# Altium PCB Copy of ACDC.PcbDoc (part 2 of 2)
Units mil, origin at the board's own origin, x right, y up, seen from the top; angles counter-clockwise.
Board outline 4750 x 3250 mil, 4 copper layers (Top Layer, Layer 1, Layer 2, Bottom Layer), stack 23.756 mil thick; 131 components, 94 nets, 665 pads, 112 vias.
Unrouted connection lines stored in the file: 74.
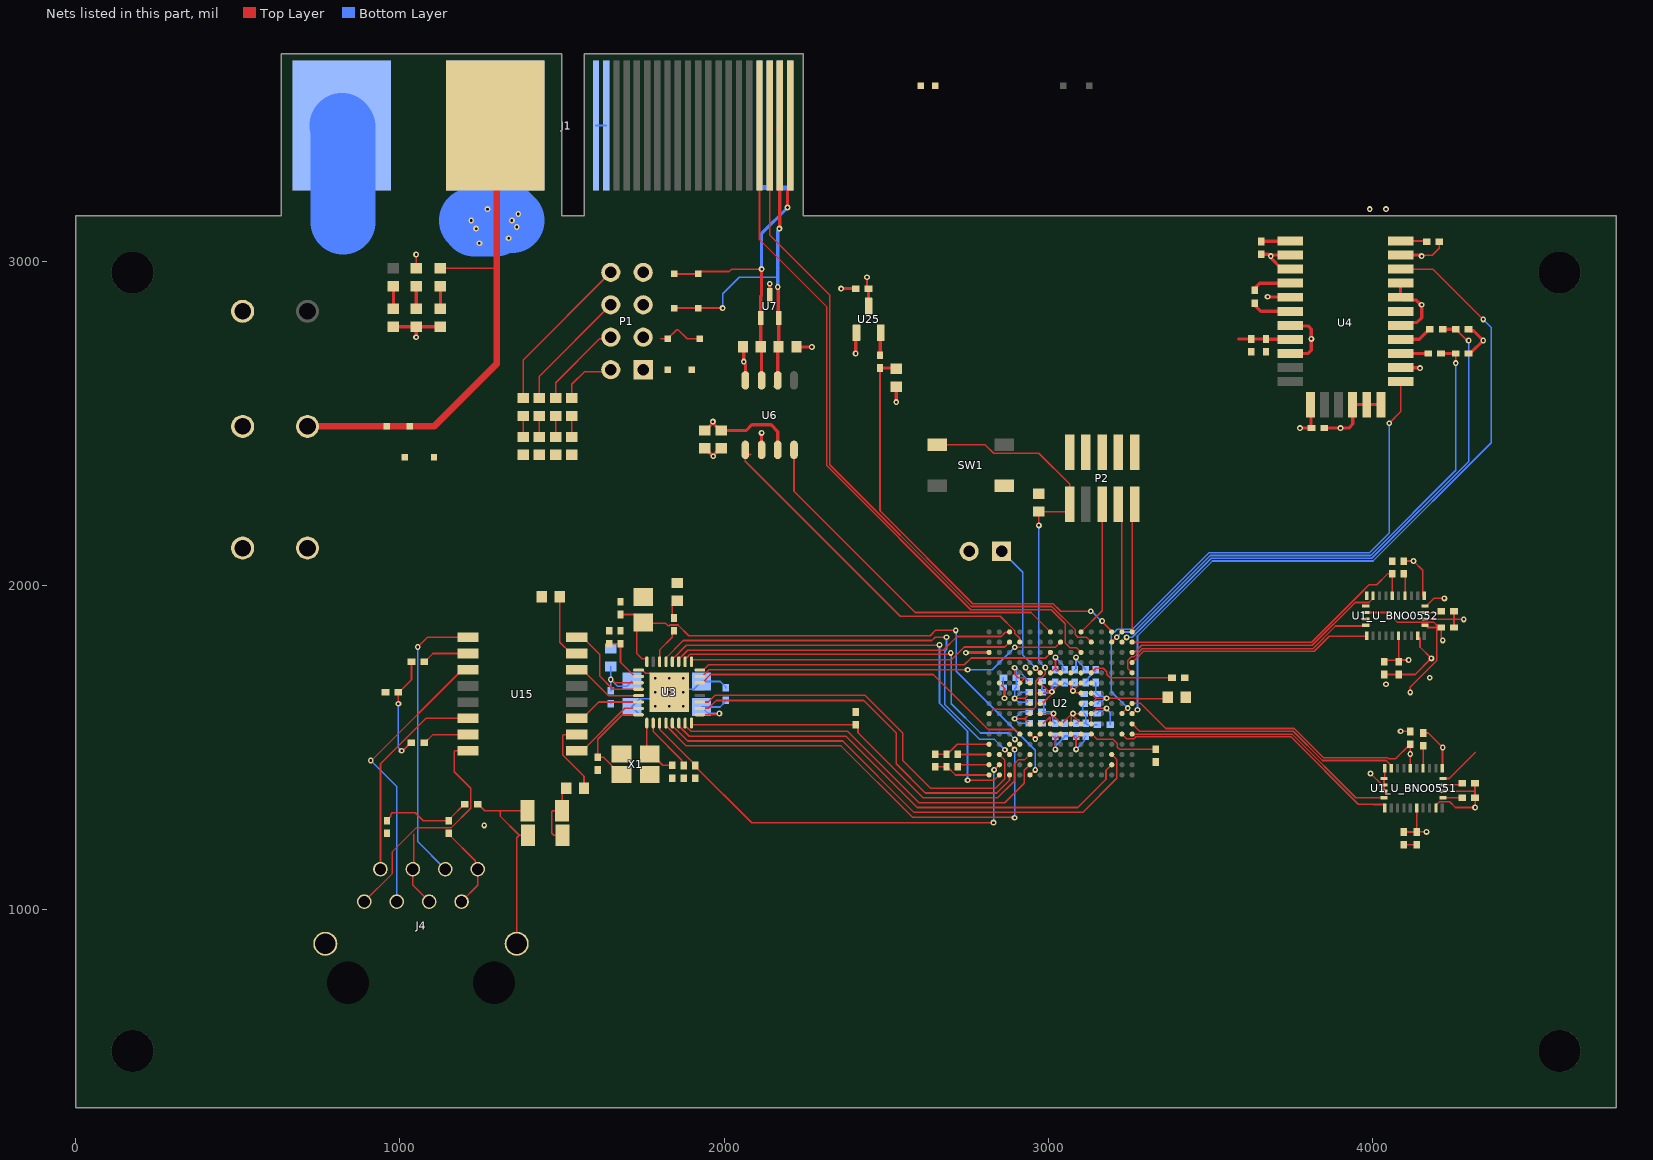
[diagram p4: the nets of this part, all layers, seen from the top]

## Via types
v1: diameter 18, hole 8, Top Layer to Bottom Layer, tented both sides, 102 vias
v2: diameter 19.68, hole 7.87, Top Layer to Bottom Layer, tented both sides, 9 vias
v3: diameter 18, hole 10, Top Layer to Bottom Layer, tented both sides, 1 vias

## Nets (pads, with @x,y where several pads share a name; then routed paths per layer and width w, separated by ;. In a path a pad name is that pad's centre, name@x,y a point inside that pad or via, vN(x,y) a via of type N, cw(c..) or ccw(c..) an arc to the next point about the centre after c; other vN are vias at no path point) (continued)
3V3: C1_U_BNO0551.2 C1_U_BNO0552.2 C3_U_BNO0551.2 C3_U_BNO0552.2 C4_U_BNO0551.2 C4_U_BNO0552.2 C6.2 C7.2 C8.2 C9.2 C10.2 C11.2 C12.2 C13.2 C14.2 C15.2 C16.2 C17.2 C18.2 C19.2 C20.2 C21.2 C22.2 C23.2 C24.2 C27.2 C28.2 C30.2 C33.1 C34.2 C35.2 C36.2 C37.2 C38.2 C42.2 C46.2 C47.2 C168.1 D8.1 FB1.1 J1.23 J12.1 J13.1 J15.1 P2.1 R2.2 R4_U_BNO0551.1 R4_U_BNO0552.1 R5_U_BNO0551.2 R5_U_BNO0552.2 R8.1 R11.2 U1_U_BNO0551.3 U1_U_BNO0551.5 U1_U_BNO0551.28 U1_U_BNO0552.3 U1_U_BNO0552.5 U1_U_BNO0552.28 U2.C1 U2.E7 U2.E8 U2.E9 U2.E10 U2.F4 U2.F5 U2.F11 U2.G5 U2.G11 U2.H5 U2.H11 U2.J5 U2.J11 U2.K5 U2.K11 U2.L7 U2.L8 U2.L9 U2.L10 U2.P1 U2.R1 U3.17 U4.8 U4.12 U6.3 U25.1 | length 4492.5
  Top Layer w5: R2.2@1050,2977.56 v1(1050,3020) ; U3.17@1924.49,1601.1 1977.58,1601.1 1981.48,1605 v1(1985,1605) ; C37.2@2650,1440.31 2687.74,1440.31 2712.54,1415.51 U2.R1@2816.54,1415.51 ; C38.2@2720,1440.31 2726.69,1447.01 U2.P1@2816.54,1447.01 ; v1(2895,1588.75) 2926.76,1588.75 U2.K5@2942.52,1572.99 ; v1(2895.25,1651.5) 2926.54,1651.5 ; v1(2895.28,1745.83) 2895.28,1726.36 2906.68,1714.95 2927,1714.95 ; U2.F4@2911.02,1698.98 2927,1714.95 ; 2926.78,1588.75 U2.J5@2942.52,1604.49 ; U2.H5@2942.52,1635.98 2927,1651.5 2926.54,1651.5 ; U2.G5@2942.52,1667.48 2926.54,1651.5 ; U2.F5@2942.52,1698.98 2927,1714.5 2927,1714.95 ; U2.L7@3005.51,1541.5 3020.87,1526.13 3020.87,1525.36 ; U2.E7@3005.51,1730.47 3021.01,1745.97 ; v1(3020.88,1494.25) 3020.87,1525.36 ; v1(3021.26,1778.1) 3021.26,1746.22 U2.E8@3037.01,1730.47 ; U2.L8@3037.01,1541.5 3020.87,1525.36 ; U2.L9@3068.5,1541.5 3084.64,1525.36 ; 3084,1743.99 3084,1744.51 ; v1(3084.64,1494.25) 3084.64,1525.36 ; U2.L10@3100,1541.5 3084.64,1526.13 3084.64,1525.36 ; U2.K11@3131.5,1572.99 U2.J11@3131.5,1604.49 3147.63,1620.62 v1(3178.74,1620.62) ; U2.H11@3131.5,1635.98 3147.51,1652 ; U2.G11@3131.5,1667.48 3146.98,1652 3147.51,1652 ; C35.2@3367.44,1655 3362.44,1650 3269.49,1650 3267.49,1652 v1(3178.75,1652) 3147.51,1652 ; C3_U_BNO0552.2@4035,1725.31 4130.31,1725.31 v1(4180,1775) 4145,1810 4145,1837.91 ; v1(4085,1550) 4114.69,1550 R5_U_BNO0551.2@4115,1549.69 ; C3_U_BNO0551.2@4095,1200.31 C4_U_BNO0551.2@4135,1200.31 ; U1_U_BNO0552.3@4156.04,1895.16 4156.2,1895 4249.69,1895 ; U1_U_BNO0552.5@4156.04,1934.53 4162.44,1934.53 4187.91,1960 v1(4220,1960) ; U1_U_BNO0551.28@4193.9,1313.48 4193.9,1321.85 4204.86,1332.82 4236.76,1332.82 4254.58,1315 v1(4315,1315) 4315,1344.69 C1_U_BNO0551.2@4314.69,1345 4314.69,1365 ; U1_U_BNO0551.3@4216.04,1365.16 4216.2,1365 4314.69,1365 ; U1_U_BNO0551.5@4216.04,1404.53 4234.86,1404.53 4315,1484.67 ; C1_U_BNO0552.2@4249.69,1870 4249.69,1895 ; R4_U_BNO0552.1@4249.69,1920 4249.69,1895 ; v1(4280,1895) 4249.69,1895 ; R4_U_BNO0551.1@4314.69,1390 4314.69,1365
  Top Layer w10: C33.1@1940,2477.56 1941.97,2477.56 1963.47,2499.06 1963.47,2503.47 v1(1965,2505) 1966.53,2503.47 1966.53,2499.06 1988.03,2477.56 C34.2@1990,2477.56 2067.64,2477.56 2085.08,2495 2144.14,2495 2165,2474.14 U6.3@2165,2417.72 ; v1(2360,2915) C168.1@2405.32,2915 ; v1(2405,2715) 2405,2776.06 U25.1@2407.6,2778.66 ; v1(2745,1792) 2745.73,1792.73 2815.8,1792.73 U2.C1@2816.54,1793.46 ; 3585.16,2759.84 3624.84,2759.84 C27.2@3625,2759.69 C28.2@3670,2759.69 3670.69,2759 3744.31,2759 U4.8@3745,2758.31 U4.8@3743.22,2756.53 ; v1(3775,2485) C30.2@3810.31,2485 3808.96,2486.36 3808.96,2556.16 U4.12@3807.6,2557.52 ; v1@4039.84,3159.84 v1(4040,3160)
  Bottom Layer w5: v1(1985,1605) 1950,1605 C46.2@1930,1625 1986.65,1625 C47.2@2000.98,1639.33 ; C47.2@2000,1640.32 C47.2@2005,1645.31 ; v1@2895.28,1740 v1(2895.28,1745.83) ; 2904.63,1740 2901.28,1743.35 2898.35,1743.35 2895,1740 2897.59,1740 2900,1737.59 2900,1685.63 C15.2@2899.37,1685 2895.25,1680.88 v1(2895.25,1651.5) ; 2919.31,1726.32 2919.31,1724.35 2938.66,1705 C23.2@2940.63,1705 ; C24.2@2936.06,1570.75 C24.2@2940.31,1575 2908.75,1575 v1(2895,1588.75) 2916.25,1610 C21.2@2940.31,1610 ; C22.2@2940.31,1640 2907.08,1640 2895.58,1651.5 v1(2895.25,1651.5) ; C16.2@2940.31,1670 2913.75,1670 v1(2895.25,1651.5) ; C19.2@3020,1535.31 3021,1534.31 3021,1494.38 v1(3020.88,1494.25) ; C18.2@3020,1739.69 3025,1734.69 3043.03,1734.69 C6.2@3050,1741.65 ; v1(3021.26,1778.1) 3043.71,1755.65 3043.71,1745.98 C6.2@3050,1739.69 ; 3023.36,1507.02 3050,1533.66 C17.2@3050,1535.63 C20.2@3085,1535.63 3085,1495 v1@3085.19,1494.81 ; C7.2@3080,1739.69 3084.25,1743.94 v1(3084.25,1778.1) 3086.74,1775.61 3086.74,1769.91 3115,1741.65 C11.2@3115,1739.69 ; v1(3084.64,1494.25) v1@3085.19,1494.81 ; C11.2@3110,1744.69 C11.2@3114.69,1740 ; C13.2@3115,1535.31 3109.32,1529.63 3109.32,1518.93 v1@3085.19,1494.81 ; C42.2@3145,1700.31 3145,1669.69 C10.2@3149.69,1665 3157.03,1657.66 3169.57,1657.66 v1@3175.23,1652 ; C8.2@3149.37,1605 3156.71,1612.34 3166.95,1612.34 3175.22,1620.62 v1(3178.74,1620.62) 3178.74,1618.41 3189.69,1607.46 C12.2@3189.69,1570 ; C9.2@3149.69,1635 3157.03,1642.34 3165.57,1642.34 v1@3175.23,1652 ; v1(3178.75,1652) v1@3175.23,1652
  Bottom Layer w200: v1(1220,3125) 1230.32,3114.68 1295,3114.68 ; J1.23@1294,3417.75 1295,3416.75 1295,3175 v1(1345,3125)
  other v1: 4175,1715 1245,3055 1335,3070 1235,3100 1360,3105 1365,3145 1270,3160
5V0: J1.1 J10.1 J11.1 J16.1 R1.2 | length 1576.8
  Top Layer w5: R1.2@1125,2977.56 1299,2977.56 1300.84,2979.39
  Top Layer w20: J16.1@715,2490 1105,2490 1299,2684 1299,2977.56 J1.1@1299,3412.75
  Top Layer w30: J1.1@1294,3417.75 J1.1@1299,3412.75
ANT_I: C25.2 U4.4 | length 115.9
  Top Layer w10: C25.2@3635,2917.56 3636.97,2917.56 3651.1,2931.69 U4.4@3745,2931.69
ANT_O: C25.1 U4.6 | length 117.2
  Top Layer w10: C25.1@3635,2862.44 3636.97,2862.44 3654.41,2845 U4.6@3745,2845
BNORX: U1_U_BNO0552.20 U2.D15 | length 752.7
  Top Layer w5: U2.D15@3257.48,1761.97 3266.39,1770.88 3266.84,1770.88 3292.41,1796.46 3818.55,1796.46 3865.57,1843.48 U1_U_BNO0552.20@3976.42,1843.48
BNORX1: U1_U_BNO0551.20 U2.L14 | length 914.3
  Top Layer w5: U2.L14@3225.98,1541.5 3240.03,1527.45 3263.3,1527.45 3268.8,1532.95 3747.05,1532.95 3955,1325 3999.58,1325 4000.31,1324.27 4034,1324.27 4036.42,1321.85 U1_U_BNO0551.20@4036.42,1313.48
BNOTX: U1_U_BNO0552.19 U2.E15 | length 818.3
  Top Layer w5: U2.E15@3257.48,1730.47 3243.44,1744.52 3243.44,1767.79 3255.07,1779.42 3263.3,1779.42 3288.88,1805 3815.01,1805 3884.57,1874.57 3973.05,1874.57 U1_U_BNO0552.19@3973.96,1875.47
BNOTX1: U1_U_BNO0551.19 U2.L15 | length 857.7
  Top Layer w5: U2.L15@3257.48,1541.5 3750.59,1541.5 3946.61,1345.47 U1_U_BNO0551.19@4033.96,1345.47
Boot0: P1.1@2855,2105 U2.E6 | length 423.8
  Top Layer w5: v1(2960,1745) 2960,1744.74 2974.02,1730.73 U2.E6@2974.02,1730.47
  Bottom Layer w5: P1.1@2855,2105 2920,2040 2920,1785 v1(2960,1745)
CANRX: U2.A7 U6.4 | length 1097.8
  Top Layer w5: U6.4@2215,2417.72 2215,2290 2588.54,1916.46 2945.51,1916.46 U2.A7@3005.51,1856.46
CANTX: U2.B4 U6.1 | length 1140.3
  Top Layer w5: U6.1@2065,2417.72 2065,2409.99 2065,2382.93 2067.93,2380 2542.93,1905 2850.84,1905 2895,1860.84 2895,1852.62 2910.88,1836.74 2910.88,1825.1 U2.B4@2911.02,1824.96 ; U6.1@2067.23,2409.99 2073.6,2403.62 2081.38,2403.62
CGND: C142.2 C145.2 C146.2 J4.9 J4.10 R51.1 | length 627.2
  Top Layer w5: C142.2@1239.69,1325 1241.65,1325 1261.65,1305 1308.7,1305 ; J4.10@1360,895 1360,1222.3 1367.7,1230 ; C146.2@1393.7,1305 1308.7,1305 ; R51.1@1395,1230 1367.7,1230 ; 1308.7,1305 1308.7,1289 1367.7,1230
  other v1: 1260,1260
COL: U2.R2 U3.28 | length 1409.5
  Top Layer w5: U3.28@1839.84,1764.49 1839.84,1774.99 1842.08,1777.23 1844.95,1777.23 1882.72,1815 2662,1815 v1(2663.5,1816.5) ; v1(2750,1399.01) 2831.53,1399.01 U2.R2@2848.03,1415.51
  Bottom Layer w5: v1(2663.5,1816.5) 2663.5,1636.5 2750,1550 v1(2750,1399.01)
CRS: U2.N3 U3.29 | length 1375.7
  Top Layer w5: U3.29@1820.16,1764.49 1820.16,1776.3 1873.86,1830 2640.17,1830 2650.17,1840 v1(2685,1840) ; v1(2865,1493) U2.N3@2879.53,1478.5
  Bottom Layer w5: v1(2685,1840) 2685,1801.67 2680,1796.67 2680,1632.92 2787.92,1525 2833,1525 v1(2865,1493)
FIX': U2.J14 U4.18 | length 1735.8
  Top Layer w5: U2.J14@3225.98,1604.49 3225.98,1605.98 v1@3240,1620 ; v1(4050,2500) 4085.16,2535.16 U4.18@4085.16,2628.39
  Bottom Layer w5: v1(3244,1621.75) 3193.46,1672.29 3193.46,1846.87 3211.34,1864.75 3258.51,1864.75 3494.38,2100.63 3989.38,2100.63 4050,2161.25 v1(4050,2500)
GND: C1_U_BNO0551.1 C1_U_BNO0552.1 C2_U_BNO0551.1 C2_U_BNO0552.1 C3_U_BNO0551.1 C3_U_BNO0552.1 C4_U_BNO0551.1 C4_U_BNO0552.1 C5.1 C6.1 C7.1 C8.1 C9.1 C10.1 C11.1 C12.1 C13.1 C14.1 C15.1 C16.1 C17.1 C18.1 C19.1 C20.1 C21.1 C22.1 C23.1 C24.1 C26.1 C27.1 C28.1 C29.1 C30.1 C31.1 C32.1 C33.2 C34.1 C35.1 C36.1 C37.1 C38.1 C39.2 C40.1 C41.1 C42.1 C43.2 C44.2 C45.2 C46.1 C47.1 C48.1 C49.2 C50.1 C51.2 C52.2 C146.1 C167.2 C168.2 D1.2 D2.2 D3.2 D4.2 D5.2 D6.2 D7.2 J1.22 J1.40 J1.41 J1.42 J1.43 J14.2 J15.2 J16.2 J17.1 J18.1 L1.2 P1.2@2755,2105 P2.3 P2.5 P2.7 P2.9 R10.1 R12.2 R18.1 R51.2 SW1.4 U1_U_BNO0551.2 U1_U_BNO0551.6 U1_U_BNO0551.15 U1_U_BNO0551.16 U1_U_BNO0551.17 U1_U_BNO0551.18 U1_U_BNO0551.25 U1_U_BNO0552.2 U1_U_BNO0552.6 U1_U_BNO0552.15 U1_U_BNO0552.16 U1_U_BNO0552.17 U1_U_BNO0552.18 U1_U_BNO0552.25 U2.E5 U2.F2 U2.F6 U2.F7 U2.F8 U2.F9 U2.F10 U2.G6 U2.G10 U2.H6 U2.H10 U2.J6 U2.J10 U2.K6 U2.K7 U2.K8 U2.K9 U2.K10 U2.L5 U2.L6 U2.M1 U2.N1 U3.1 U3.33 U4.2 U4.3 U4.5 U4.7 U4.9 U4.15 U4.16 U4.17 U4.19 U4.22 U4.23 U4.24 U4.25 U4.27 U6.2 U6.8 U7.3 U25.3 X1.2 X1.4 | length 6804.3
  Top Layer w5: R51.2@1501.3,1230 1474,1230 1467.92,1236.08 1467.92,1302.07 1470.85,1305 C146.1@1500,1305 1500,1362.56 C49.2@1512.44,1375 ; U3.1@1735.51,1738.9 1747.32,1738.9 1757.7,1728.52 1771.48,1728.52 v2(1786.69,1713.31) ; v1(2440,2950) 2440,2919.69 C168.2@2444.69,2915 ; C37.1@2650,1479.68 C36.1@2685,1479.68 2687.74,1479.68 2718.05,1510 U2.M1@2816.54,1510 ; C38.1@2720,1479.68 2721.18,1478.5 U2.N1@2816.54,1478.5 ; U2.F2@2846.02,1698.98 U2.F2@2848.03,1698.98 2864,1683.01 v1(2864,1651.75) ; v1@2930,1740 2930.13,1740 2939.65,1730.47 U2.E5@2942.52,1730.47 ; U2.L5@2942.52,1541.5 2942.76,1541.5 2958.26,1526 v1(2958.5,1526) U2.L6@2974.02,1541.5 ; U2.F6@2973.5,1697.01 U2.F6@2977.99,1697.01 ; U2.K6@2974.02,1572.99 2975.49,1574.46 2984.46,1574.46 3003.75,1593.75 ; U2.J6@2974.02,1604.49 2974.27,1604.74 3014.74,1604.74 v1(3015,1605) ; U2.H6@2974.02,1635.98 2976.12,1638.09 2983.22,1638.09 3010,1664.87 v1(3010,1672.2) ; U2.G6@2974.02,1667.48 3001.76,1667.48 v1@3006.48,1672.2 ; U2.F6@2974.02,1698.98 2998.31,1674.69 3007.51,1674.69 v1(3010,1672.2) ; v1@3004.64,1670.36 v1@3006.48,1672.2 ; U2.K7@3005.51,1572.99 3005.51,1591.99 3015,1601.48 v1(3015,1605) ; U2.F7@3005.51,1698.98 3007.62,1696.87 v1@3007.62,1674.58 ; U2.K8@3036.5,1571.26 3036.5,1575.63 3017.49,1594.64 3017.49,1601.48 3015,1603.97 v1(3015,1605) ; U2.K8@3036.5,1572.48 U2.K8@3037.01,1572.99 3039.98,1572.99 3071.99,1605 v1(3075,1605) ; U2.F8@3037.01,1698.98 3036.89,1698.98 3010.11,1672.2 v1(3010,1672.2) ; U2.K9@3068.5,1572.99 3070,1574.49 3070,1596.48 3075,1601.48 v1@3075,1604.74 ; U2.F9@3068.5,1698.98 3068.5,1680.01 3073.83,1674.69 v1(3075,1674.69) 3075.35,1674.69 3099.65,1698.98 U2.F10@3100,1698.98 ; v1@3078.52,1674.69 3084.5,1668.7 3098.78,1668.7 U2.G10@3100,1667.48 ; U2.K10@3100,1572.99 3077.49,1595.5 3077.49,1602.51 v1(3075,1605) ; U2.J10@3100,1604.49 3099.74,1604.74 v1@3075,1604.74 ; U1_U_BNO0552.16@3969.75,1938.46 3972.17,1936.04 U1_U_BNO0552.16@3978.17,1936.04 3975.51,1936.04 U1_U_BNO0552.16@3974,1934.53 ; U1_U_BNO0552.18@3975,1899.09 3977.42,1896.67 U1_U_BNO0552.18@3978.17,1896.67 ; U1_U_BNO0552.17@3975,1913.94 3977.42,1916.36 4044.9,1916.36 4075.55,1885.71 4187.86,1885.71 4196.5,1877.07 4196.5,1870 ; v1(3992.4,1420) 4027.56,1384.84 U1_U_BNO0551.17@4033.96,1384.84 ; U1_U_BNO0551.18@4033.96,1365.16 U1_U_BNO0551.17@4033.96,1384.84 ; U1_U_BNO0551.16@4033.96,1404.53 U1_U_BNO0551.17@4033.96,1384.84 ; U1_U_BNO0551.16@4033.96,1404.53 4036.42,1406.95 U1_U_BNO0551.15@4036.42,1436.52 ; C3_U_BNO0552.1@4035,1764.68 4040,1769.68 4079.68,1769.68 C4_U_BNO0552.1@4080,1770 ; U1_U_BNO0552.25@4080,1847.84 C4_U_BNO0552.1@4080,1770 ; C2_U_BNO0552.1@4095,2074.68 4095.32,2075 v1(4125,2075) 4153.58,2046.42 U1_U_BNO0552.6@4153.58,1966.52 ; 4105,1241.65 4106.97,1239.68 C4_U_BNO0551.1@4135,1239.68 ; v1(4110,1770) C4_U_BNO0552.1@4080,1770 ; v1(4115,1670) 4115,1686.67 4196.5,1768.17 4196.5,1870 ; U1_U_BNO0551.25@4134.84,1313.48 4134.84,1239.84 C4_U_BNO0551.1@4135,1239.68 ; v1(4150,3015) 4152.49,3017.49 4182.49,3017.49 4204.69,3039.69 L1.2@4204.69,3060 L1.2@4202.72,3060 ; C2_U_BNO0551.1@4155,1544.68 4170.31,1544.68 v1(4215,1500) 4214.29,1499.29 4214.29,1437.22 U1_U_BNO0551.6@4213.58,1436.52 ; U1_U_BNO0552.2@4160.26,1876.99 4161.77,1875.47 4162.44,1875.47 4167.91,1870 4196.5,1870 ; v1(4165,1240) 4135.32,1240 C4_U_BNO0551.1@4135,1239.68 ; v1(4215.2,1830.2) 4215,1830.41 4215,1833.52 4210.31,1838.2 C1_U_BNO0552.1@4210.31,1870 4196.5,1870 ; U1_U_BNO0551.2@4216.04,1345.47 4274.84,1345.47 C1_U_BNO0551.1@4275.31,1345 ; v1@3006.48,1672.2 v1(3010,1672.2) ; v1@3075,1604.74 v1(3075,1605)
  Top Layer w10: D3.2@980,2797.44 D2.2@1050,2797.44 ; v1(1050,2765) D2.2@1050,2797.44 ; D1.2@1125,2797.44 D2.2@1050,2797.44 ; C33.2@1940,2422.44 1941.97,2422.44 v1(1966.1,2398.31) 1967.63,2399.84 1967.63,2402.04 1988.03,2422.44 C34.1@1990,2422.44 C34.1@1991.97,2422.44 ; C31.1@2057.44,2735 2060,2732.44 v1(2060,2690) 2060,2687.84 2065,2682.84 U6.8@2065,2632.28 ; U6.2@2115,2400.98 U6.2@2115,2417.72 v1(2115,2470) ; U7.3@2140,2895.43 v1(2140,2930) ; C32.1@2222.56,2735 v3(2270,2735) ; C168.2@2444.69,2915 2444.84,2914.84 2444.84,2861.5 U25.3@2445,2861.34 ; v1(2530,2565) C167.2@2530,2612.44 ; R18.1@3655,3020.63 3677.21,3020.63 3682.84,3015 v1(3685,3015) ; v1(3675,2890) 3675.89,2889.11 3744.11,2889.11 U4.5@3745,2888.23 ; U4.9@3745,2715 3800,2715 3810,2725 v1(3810,2760) 3810,2790 3800,2800 ; U4.3@3745,2975 3719.41,2975 3686.53,3007.88 3686.53,3013.47 v1(3685,3015) ; U4.2@3745,3018.31 3690.47,3018.31 3687.16,3015 v1(3685,3015) ; U4.7@3770.59,2800 3800,2800 ; U4.7@3770.59,2801.69 U4.7@3745,2801.69 3744.15,2800.85 3745,2800 3800,2800 ; C30.1@3849.68,2485 v1(3900,2485) 3925,2485 3937.52,2497.52 U4.15@3937.52,2557.52 U4.16@3980.83,2557.52 U4.17@4024.13,2557.52 ; v1@3990,3157.84 v1(3990,3160) ; U4.19@4085.16,2671.69 4086,2670.85 4144.15,2670.85 v1(4145,2670) ; U4.22@4085.16,2801.69 4093.94,2810.47 4135.47,2810.47 4150,2825 v1(4150,2865) 4147.84,2865 4133.39,2879.45 4093.94,2879.45 U4.24@4085.16,2888.23 U4.25@4085.16,2931.69 ; U4.27@4085.16,3018.31 4144.53,3018.31 4147.84,3015 v1(4150,3015) ; C29.1@4294.69,2715 4299.53,2719.84 4304.84,2719.84 v1(4340,2755) 4309.84,2785.16 4299.53,2785.16 C26.1@4294.69,2790
  Bottom Layer w3.54: v2@1827.76,1624.46 v2(1830,1626.69)
  Bottom Layer w5: J1.22@750,3346.75 J1.22@821,3417.75 ; C43.2@1650,1635.31 C43.2@1650,1637.28 ; C39.2@1735,1605.63 C39.2@1715,1625.63 1739.37,1650 1810,1650 v2(1830,1670) 1830.27,1670 1840.27,1680 1906.26,1680 C46.1@1930,1703.74 1987.91,1703.74 2005,1686.65 C47.1@2005,1684.68 C47.1@2005,1682.72 ; v2@1786.69,1665 v2(1786.69,1670) ; C14.1@2860.63,1715 2860,1714.37 C15.1@2860,1685 2864,1681 v1(2864,1651.75) ; C21.1@2979.68,1610 2979.86,1610.17 C21.1@2985,1610.17 ; C22.1@2979.68,1640 2985,1634.69 C21.1@2985,1610.17 ; C23.1@2980,1705 2979.68,1705 2979.68,1677.34 2980.67,1676.36 2988.01,1676.36 2988.01,1670.98 2989,1670 v1@3001.48,1670 ; C19.1@3020,1574.68 3012.66,1582.03 3012.66,1593.82 3010,1596.48 3015,1601.48 v1(3015,1605) 3011.48,1605 3006.31,1610.17 C21.1@2985,1610.17 ; C7.1@3072.66,1692.97 3072.66,1680.86 3075,1678.52 v1(3075,1674.69) ; C7.1@3080,1700.32 3077.66,1700.32 3072.66,1695.32 3055,1695.32 C6.1@3050,1700.32 3045,1695.32 3020.31,1695.32 3020,1695.63 C18.1@3020,1700.32 3012.66,1692.97 v1@3012.66,1678.37 ; C20.1@3085,1575 3085.32,1574.68 C13.1@3115,1574.68 ; C9.1@3110.32,1635 3105.63,1630.31 3105.63,1609.37 C8.1@3110,1605 3115,1600 C13.1@3115,1574.68 ; C11.1@3115,1700.32 3122.34,1707.66 3122.34,1715.06 3145,1737.72 C42.1@3145,1739.68 ; C12.1@3150.32,1570 3119.68,1570 C13.1@3115,1574.68 ; v1@3012.66,1678.37 3012.66,1674.86 v1(3010,1672.2) 3010,1675.72 v1@3012.66,1678.37
  Bottom Layer w15: J1.40@2108.5,3417.75 2108.5,3229.52 2110.84,3227.18 2137.66,3227.18 2140,3229.52 J1.41@2140,3417.75 ; J1.42@2171.5,3417.75 2171.5,3227.59 2173.84,3225.25 2200.66,3225.25 2203,3227.59 J1.43@2203,3417.75
  Bottom Layer w200: J1.22@821,3417.75 J1.22@825,3413.75 ; 825,3119.68 J1.22@825,3413.75 ; J1.22@825,3346.75 J1.22@825,3413.75
  other v1: 4040,1695 2929,1746.75
  other v2: 1786.69,1626.69 1873.31,1626.69 1873.31,1670 1830,1713.31 1873.31,1713.31
GPSRX: C29.2 L3.2 U2.B13 | length 1686.3
  Top Layer w5: U2.B13@3194.49,1824.96 3194.69,1824.96 3209.76,1840.04 v1(3209.96,1840.04) ; v1(4255.31,2685.31) C29.2@4255.31,2715
  Top Layer w10: L3.2@4209.69,2715 C29.2@4255.31,2715
  Bottom Layer w5: v1(3209.96,1840.04) 3226.13,1856.21 3262.04,1856.21 3497.92,2092.09 3992.92,2092.09 4255.31,2354.48 v1(4255.31,2685.31)
GPSTX: C26.2 L2.2 U2.B14 | length 1768.9
  Top Layer w5: U2.B14@3225.98,1824.96 3225.98,1825.2 3240.25,1839.47 v1(3240.25,1839.71) ; C26.2@4255.31,2790 4257.28,2790 4264.63,2782.66 4264.63,2780.69 4287.83,2757.49 4292.51,2757.49 v1(4295,2755)
  Top Layer w10: L2.2@4214.69,2790 4248.35,2790 4248.5,2790.16 C26.2@4255.16,2790.16
  Bottom Layer w5: v1(3240.25,1839.71) 3257.63,1839.71 3501.46,2083.54 3996.46,2083.54 4295,2382.08 v1(4295,2755)
HW_S: U2.J15 U4.26 | length 2296.4
  Top Layer w5: U2.J15@3257.48,1604.49 3258.38,1604.49 3268.89,1615 v1@3275,1615 ; U4.26@4085.16,2975 4185,2975 v1(4340,2820)
  Bottom Layer w5: v1(3274,1616.75) 3274,1844 3505,2075 4000,2075 4365,2440 4365,2795 v1(4340,2820)
INT: U1_U_BNO0552.14 U2.C15 | length 820
  Top Layer w5: U2.C15@3257.48,1793.46 3259.55,1795.54 3267.33,1795.54 3286.79,1815 3812.93,1815 3944.93,1947.01 3987.66,1947.01 4000.32,1959.67 U1_U_BNO0552.14@4000.32,1968.03
INT_U_BNO0551: U1_U_BNO0551.14 U2.K15 | length 856.6
  Top Layer w5: U2.K15@3257.48,1572.99 3280.43,1550.04 3754.12,1550.04 3844.16,1460 4040.98,1460 4056.1,1444.88 U1_U_BNO0551.14@4056.1,1440
M2RBRX: J1.19 J4.1@1925,2760 J5.1 P1.3 U2.B11 | length 2307.6
  Top Layer w5: 1805,2760 J5.1@1825,2760 1853.34,2788.34 1857.48,2788.34 1885.82,2760 J4.1@1925,2760 ; J1.19@2140,3417.75 2140,3080 2325,2895 2325,2372.08 2762.08,1935 3009.82,1935 3082.55,1862.27 3082.55,1847.45 3090,1840 3116.46,1840 U2.B11@3131.5,1824.96
M2RBTX: J1.18 J2.1 J3.1 P1.1@1750,2665 U2.C10 | length 2191.7
  Top Layer w5: J1.18@2108.5,3417.75 2108.5,3066.5 2316.46,2858.54 2316.46,2368.54 2760,1925 3007.74,1925 3051.05,1881.69 3051.05,1822.55 3066.1,1807.51 3085.96,1807.51 U2.C10@3100,1793.46
MDC: U2.M3 U3.12 | length 1433.9
  Top Layer w5: U3.12@1820.16,1575.51 1820.16,1565.01 1822.39,1562.77 1825.26,1562.77 1883.04,1505 2360,1505 2580,1285 2893.5,1285 v1(2895,1283.5) ; U2.M3@2879.53,1510 2880,1510 v1@2895,1495
  Bottom Layer w5: v1(2895,1283.5) v1(2895,1493.75)
MDIO: R11.1 U2.P2 U3.11 | length 1356.5
  Top Layer w5: U3.11@1800.47,1575.51 1800.5,1556.16 1902.66,1454 1910,1446.65 1910,1442.72 2084.22,1268.5 v1(2830,1268.5) ; v1(2831.9,1431.26) 2832.09,1431.26 2847.84,1447.01 U2.P2@2848.03,1447.01
  Bottom Layer w5: v1(2830,1268.5) 2830.95,1269.45 2830.95,1430.31 v1(2831.9,1431.26)
NetC2_U_BNO0551_2: C2_U_BNO0551.2 U1_U_BNO0551.9 | length 69
  Top Layer w5: U1_U_BNO0551.9@4154.53,1436.52 C2_U_BNO0551.2@4154.53,1504.84
  Top Layer w10: C2_U_BNO0551.2@4154.53,1504.84 C2_U_BNO0551.2@4155,1505.31
NetC2_U_BNO0552_2: C2_U_BNO0552.2 U1_U_BNO0552.9 | length 73
  Top Layer w5: C2_U_BNO0552.2@4095,2035.31 4100,2030.32 U1_U_BNO0552.9@4100,1964.34
NetC31_2: C31.2 J1.21 J8.1 J9.1 P1.7 U6.7 U7.1 | length 1093.7
  Top Layer w5: J9.1@1845,2960 J8.1@1920,2960 ; J8.1@1924.64,2964.64 1927.5,2967.5 2015.74,2967.5 2023.24,2975 v1(2115,2975) ; 2195,3217.32 2195.66,3217.98 2195.66,3410.41 J1.21@2203,3417.75
  Top Layer w10: U6.7@2115,2632.28 2115,2732.56 C31.2@2112.56,2735 2112.44,2735.12 U7.1@2112.44,2824.57 2112.44,2891.94 2115,2894.5 v1(2115,2975) ; v1(2195,3165) 2195,3217.32
  Bottom Layer w10: v1(2115,2975) 2115,3085 v1(2195,3165)
NetC32_2: C32.2 J1.20 J6.1 J7.1 P1.5 U6.6 U7.2 | length 1236.6
  Top Layer w5: P1.5@1750,2865 1760.34,2854.66 P1.5@1775.34,2854.66 ; J7.1@1845,2855 J6.1@1920,2855 v1(1995,2855) ; J1.20@2164.16,3410.41 J1.20@2171.5,3417.75
  Top Layer w10: U6.6@2154.45,2612.94 2158.71,2612.94 2165,2619.24 U6.6@2165,2632.28 2165,2732.56 2167.56,2735.12 U7.2@2167.56,2824.57 2166.28,2825.85 2166.28,2918.72 v1(2165,2920) ; J1.20@2164.16,3410.41 2170.75,3403.82 2170.75,3100.75 v1(2170,3100)
  Bottom Layer w5: v1(1995,2855) 1995,2898.86 2046.14,2950 2165,2950
  Bottom Layer w10: v1(2165,2920) 2165,2950 2165,3092.84 2170,3097.84 v1(2170,3100)
NetC39_1: C39.1 C43.1 FB1.2 U3.3 | length 266.4
  Top Layer w5: v1(1649.84,1709.79) 1652.66,1709.79 1662.92,1699.53 U3.3@1735.51,1699.53
  Bottom Layer w5: v1@1645,1715 v1@1650,1710 ; FB1.2@1650,1750 v1@1650,1710 ; C43.1@1659.31,1684 1657.34,1684 C43.1@1650,1676.65 ; C39.1@1715,1704.37 1700,1689.37 1670.63,1689.37 v1@1650,1710 ; C43.1@1650,1676.65 C43.1@1650,1674.68 C43.1@1650,1676.65 ; C43.1@1650,1676.65 v1@1650,1710
NetC40_2: C40.2 U2.L11 | length 224.6
  Top Layer w5: U2.L11@3131.5,1541.5 3133.5,1541.5 3150,1525 3199.35,1525 3211.94,1512.41 3211.94,1500.99 3218.24,1494.69 C40.2@3330,1494.69
NetC41_2: C41.2 U2.E11 | length 271.7
  Top Layer w5: U2.E11@3131.5,1730.47 3145.54,1744.52 3168.81,1744.52 3179.45,1733.87 3179.45,1725.65 3190.1,1715 C41.2@3380.31,1715
NetC44_1: C44.1 C45.1 U3.2 | length 166
  Top Layer w5: C45.1@1645,1820.32 C44.1@1680,1820.32 1680,1762.91 1723.7,1719.21 U3.2@1735.51,1719.21
NetC49_1: C49.1 U15.2 | length 233.3
  Top Layer w5: U15.2@1545.04,1540 1505.06,1540 1502.13,1537.07 1502.13,1476.92 1567.56,1411.49 C49.1@1567.56,1375
NetC50_2: C50.2 U3.9 X1.1 | length 183.7
  Top Layer w5: U3.9@1761.1,1575.51 1761.1,1488.9 X1.1@1770,1480 1774.92,1480 1809.92,1445 C50.2@1840,1445
NetC51_1: C51.1 U15.7 | length 189.5
  Top Layer w5: C51.1@1492.56,1965 1492.56,1824.96 U15.7@1527.52,1790
NetC52_1: C52.1 U3.8 X1.3 | length 308.7
  Top Layer w5: X1.3@1683.39,1417.01 1678.46,1417.01 1655.37,1440.1 1655.37,1441.97 1627.34,1470 C52.1@1610,1470 1610,1525.36 1685.74,1601.1 U3.8@1735.51,1601.1
NetC142_1: C142.1 R44.2 R45.2 | length 286.4
  Top Layer w5: R45.2@960,1274.69 960,1276.65 971.46,1288.11 971.46,1293.54 976.46,1298.54 1047.63,1298.54 1071.49,1274.69 R44.2@1150,1274.69 1150,1276.65 1157.34,1284 1198.35,1325 C142.1@1200.32,1325
NetC145_1: C145.1 R43.1 R46.1 | length 343.1
  Top Layer w5: v1(995.04,1635) 994.68,1635.32 C145.1@994.68,1670 996.65,1670 1035.63,1708.98 R46.1@1035.63,1765 ; v1@1000,1490 v1(1005.04,1490) 1008.35,1490 1033.35,1515 R43.1@1035.32,1515
  Bottom Layer w5: v1(995.04,1635) 995.04,1500 v1(1005.04,1490)
NetC167_1: C167.1 R52.2 U2.A13 | length 1364.7
  Top Layer w5: R52.2@2480,2668.35 R52.2@2480,2670.31 ; R52.2@2480,2670 2480,2230 2766.46,1943.54 3013.36,1943.54 3036.9,1920 v1(3130,1920) ; v1(3165,1890) 3165,1887.97 3194.49,1858.48 U2.A13@3194.49,1856.46
  Top Layer w10: R52.2@2480,2670.31 2527.24,2670.31 C167.1@2530,2667.56
  Bottom Layer w5: v1(3130,1920) 3132.5,1920 3162.5,1890 v1(3165,1890)
NetD1_1: D1.1 R1.1 | length 69.9
  Top Layer w10: D1.1@1125,2852.56 R1.1@1125,2922.44
NetD2_1: D2.1 R2.1 | length 69.9
  Top Layer w10: D2.1@1050,2852.56 R2.1@1050,2922.44
NetD3_1: D3.1 R3.1 | length 69.9
  Top Layer w10: D3.1@980,2852.56 R3.1@980,2922.44
NetD4_1: D4.1 R4.1 | length 64.9
  Top Layer w5: D4.1@1530,2457.56 R4.1@1530,2522.44
NetD5_1: D5.1 R5.1 | length 64.9
  Top Layer w5: D5.1@1480,2457.56 R5.1@1480,2522.44
NetD6_1: D6.1 R6.1 | length 64.9
  Top Layer w5: D6.1@1430,2457.56 R6.1@1430,2522.44
NetD7_1: D7.1 R7.1 | length 64.9
  Top Layer w5: D7.1@1380,2457.56 R7.1@1380,2522.44
NetD8_2: D8.2 R9.1 | length 62.4
  Top Layer w5: R9.1@1845,1899.37 1840,1904.37 1840,1939.19 1853.25,1952.44 D8.2@1855,1952.44
NetJ1_24: J1.24 J1.25 | length 31.5
  Bottom Layer w5: J1.24@1604.5,3417.75 J1.25@1636,3417.75
NetJ4_4: J4.4 J4.5 R45.1 | length 240.2
  Top Layer w5: R45.1@952.66,1227.97 R45.1@960,1235.32 ; 1042.66,1232.97 1042.66,1127.66 J4.4@1040,1125 1040,1075 J4.5@1090,1025
NetJ4_7: J4.7 J4.8 R44.1 | length 268.3
  Top Layer w5: R44.1@1150,1235.32 1150,1233.35 1232.35,1151 1232.35,1132.65 J4.8@1240,1125 1240,1075 J4.7@1190,1025
NetL1_1: L1.1 U4.28 | length 81.1
  Top Layer w5: U4.28@4085.16,3061.69 4163.62,3061.69 L1.1@4165.31,3060
  Top Layer w10: U4.28@4085.16,3061.69 U4.28@4085.32,3061.85
NetL2_1: L2.1 U4.21 | length 103.3
  Top Layer w10: U4.21@4085.16,2758.31 4086,2759.15 4142.5,2759.15 4173.35,2790 L2.1@4175.31,2790
NetL3_1: L3.1 U4.20 | length 85.2
  Top Layer w10: U4.20@4085.16,2715 L3.1@4170.31,2715
NetP1_2: P1.2@1650,2665 R4.2 | length 181.1
  Top Layer w5: R4.2@1530,2577.56 1530,2620 1568.94,2658.94 1643.94,2658.94 P1.2@1650,2665
NetP1_4: P1.4 R5.2 | length 275.4
  Top Layer w5: R5.2@1480,2577.56 1480,2625 1615.9,2760.9 1645.9,2760.9 P1.4@1650,2765
NetP1_6: P1.6 R6.2 | length 378.6
  Top Layer w5: R6.2@1430,2577.56 1430,2645 P1.6@1650,2865
NetP1_8: P1.8 R7.2 | length 499.3
  Top Layer w5: R7.2@1380,2577.56 1380,2695 P1.8@1650,2965
NetR4_U_BNO0551_2: R4_U_BNO0551.2 U1_U_BNO0551.4 | length 61.4
  Top Layer w5: U1_U_BNO0551.4@4216.04,1384.84 4270.16,1384.84 R4_U_BNO0551.2@4275.31,1390
NetR4_U_BNO0552_2: R4_U_BNO0552.2 U1_U_BNO0552.4 | length 56.4
  Top Layer w5: U1_U_BNO0552.4@4156.04,1914.84 4205.16,1914.84 R4_U_BNO0552.2@4210.31,1920
NetR9_2: R9.2 U3.30 | length 114
  Top Layer w5: U3.30@1800.47,1764.49 1800.47,1800.47 1840,1840 1840,1855 R9.2@1845,1860
NetR10_2: R10.2 U3.10 | length 170.2
  Top Layer w5: U3.10@1780.79,1575.51 1780.79,1549.21 1869.25,1460.75 1869.25,1450.12 R10.2@1875,1444.37
NetR18_2: R18.2 U4.1 | length 90.7
  Top Layer w10: R18.2@3655,3060 3655.85,3060.85 3744.15,3060.85 U4.1@3745,3061.69
NetR43_2: R43.2 U15.15 | length 145.7
  Top Layer w5: R43.2@1074.69,1515 1076.65,1515 1101.65,1540 U15.15@1210,1540
NetR46_2: R46.2 U15.10 | length 145.4
  Top Layer w5: R46.2@1075,1765 1076.97,1765 1101.97,1790 U15.10@1210,1790
NetR52_1: R52.1 U25.2 | length 70
  Top Layer w10: R52.1@2480,2709.68 2481.2,2710.89 2481.2,2777.46 U25.2@2482.4,2778.66
NetU3_4: U3.4 U15.8 | length 295.6
  Top Layer w5: U15.8@1545.04,1840 1562.56,1840 1615.73,1786.82 1615.73,1720.56 1656.45,1679.84 U3.4@1735.51,1679.84
NetU3_5: U3.5 U15.6 | length 223.5
  Top Layer w5: U15.6@1545.04,1740 1562.56,1740 1642.4,1660.16 U3.5@1735.51,1660.16
NetU3_6: U3.6 U15.3 | length 211.4
  Top Layer w5: U15.3@1545.04,1590 1562.56,1590 1613.03,1640.47 U3.6@1735.51,1640.47
NetU3_7: U3.7 U15.1 | length 244.6
  Top Layer w5: U15.1@1545.04,1490 1562.56,1490 1693.35,1620.79 U3.7@1735.51,1620.79
nRESET: R5_U_BNO0552.1 U1_U_BNO0552.11 U2.B15 | length 957.2
  Top Layer w5: U2.B15@3257.48,1824.96 3810.8,1824.96 3969.67,1983.82 3973.21,1987.36 3987.81,2001.97 4011.66,2001.97 4045,2035.32 R5_U_BNO0552.1@4060,2035.32 4059.37,2034.69 U1_U_BNO0552.11@4059.37,1968.03
nRESET_U_BNO0551: R5_U_BNO0551.1 U1_U_BNO0551.11 U2.H15 | length 1021
  Top Layer w5: U2.H15@3257.48,1635.98 3284.02,1635.98 3361.42,1558.58 3757.66,1558.58 3847.7,1468.54 4044.52,1468.54 4048.07,1465 4069.68,1465 R5_U_BNO0551.1@4115,1510.32 4115.16,1510.16 4115.16,1480 U1_U_BNO0551.11@4115.16,1436.52
  other v1: 4115,1480
NRST: C5.2 P2.10 SW1.1 U2.J1 | length 1427.2
  Top Layer w5: SW1.1@2656.65,2432.99 2804.8,2432.99 2830.34,2407.45 2969.85,2407.45 3065,2312.3 3065,2235.37 3072.93,2227.44 C5.2@2970,2227.44 v1(2970,2185) ; U2.J1@2816.54,1604.49 2830.58,1618.53 2953.53,1618.53 2960,1625 2960,1630.14 ; 2959.97,1630.17 2959.97,1704.79 2969.9,1714.72 2978.13,1714.72 2990,1726.6 v1@2990,1745
  Bottom Layer w5: v1(2970,2185) 2970,1765.75 v1(2989,1746.75)
RST: C48.2 R8.2 U2.R5 U3.32 | length 1773.1
  Top Layer w5: R8.2@1680,1910.31 1725.32,1910.31 C48.2@1750,1885.63 ; U3.32@1761.1,1764.49 1761.1,1771.56 1758.87,1773.8 1746.2,1773.8 1730,1790 1730,1865.63 C48.2@1750,1885.63 ; v1(2713.76,1861.24) 2651.24,1861.24 2635,1845 1890.2,1845 1857.35,1877.85 1832.65,1877.85 1830.49,1875.69 1826.34,1875.69 1819.34,1882.69 1752.94,1882.69 C48.2@1750,1885.63 ; U2.R5@2942.52,1415.51 2942.71,1415.51 2958.46,1431.26 v1(2958.65,1431.26)
  Bottom Layer w5: v1(2713.76,1861.24) 2715,1860 2715,1735 2958.65,1491.35 v1(2958.65,1431.26)
RX+: J4.3 U15.11 | length 884.1
  Top Layer w5: v1(910.04,1460) 912.48,1460 1192.48,1740 U15.11@1210,1740
  Bottom Layer w5: v1(910.04,1460) 990,1380.04 J4.3@990,1025
RX-: J4.6 U15.9 | length 887.6
  Top Layer w5: v1(1055,1810) 1085,1840 U15.9@1210,1840
  Bottom Layer w5: v1(1055,1810) 1055,1210 J4.6@1140,1125
RXC: U2.N2 U3.19 | length 1211.8
  Top Layer w5: U3.19@1924.49,1640.47 1950.47,1640.47 1971.46,1661.46 2433.54,1661.46 2550,1545 2550,1460 2635,1375 2837.07,1375 2865,1402.93 2865,1461.54 U2.N2@2848.03,1478.5
RXD0: R12.1 U2.N5 U3.16 | length 1237.8
  Top Layer w5: U3.16@1898.9,1575.51 1898.9,1572.24 1901.13,1570 2404.68,1570 R12.1@2405,1570.32 2412.34,1562.97 2412.34,1545.58 2612.92,1345 2842.08,1345 2893.57,1396.49 2893.57,1449.42 2907.06,1462.91 2926.92,1462.91 U2.N5@2942.52,1478.5
RXD1: U2.P5 U3.15 | length 1242.8
  Top Layer w5: U3.15@1879.21,1575.51 1879.21,1565.01 1881.45,1562.77 1884.32,1562.77 1897.09,1550 2380,1550 2600,1330 2865,1330 2925.07,1390.07 2925.07,1429.56 U2.P5@2942.52,1447.01
RXD2: U2.P13 U3.14 | length 1519.8
  Top Layer w5: U3.14@1859.53,1575.51 1859.53,1565.01 1861.76,1562.77 1864.63,1562.77 1892.41,1535 2375,1535 2595,1315 3090,1315 3177.04,1402.04 3177.04,1429.56 U2.P13@3194.49,1447.01
RXD3: U2.N13 U3.13 | length 1613.9
  Top Layer w5: U3.13@1839.84,1575.51 1839.84,1565.01 1842.08,1562.77 1844.95,1562.77 1887.72,1520 2365,1520 2585,1300 3105,1300 3210,1405 3210,1462.99 U2.N13@3194.49,1478.5
RXDV: U2.R3 U3.18 | length 1171.1
  Top Layer w5: U3.18@1924.49,1620.79 1950.79,1620.79 1975,1645 2430,1645 2530,1545 2530,1450 2620,1360 2840,1360 2879.53,1399.53 U2.R3@2879.53,1415.51
SDWIO: P2.2 U2.A15 | length 396.5
  Top Layer w5: U2.A15@3257.48,1856.46 3257.48,2242.36 P2.2@3265,2249.88
SWDCLK: P2.4 U2.A14 | length 398
  Top Layer w5: P2.4@3215,2249.88 3225.98,2238.9 U2.A14@3225.98,1856.46
SWO: P2.6 U2.A10 | length 420.3
  Top Layer w5: U2.A10@3100,1856.46 3165,1921.46 P2.6@3165,2249.88
TX+: J4.1@890,1025 U15.16 | length 726.5
  Top Layer w5: J4.1@890,1025 976.8,1111.8 976.8,1179.2 1050.77,1253.17 1158.68,1253.17 1218.17,1312.65 1218.17,1374.32 1167.09,1425.4 1167.09,1487.07 1170.02,1490 U15.16@1210,1490
TX-: J4.2 U15.14 | length 652.9
  Top Layer w5: J4.2@940,1125 940,1449.89 1080.11,1590 U15.14@1210,1590
TXC: U2.L4 U3.22 | length 1074.8
  Top Layer w5: U3.22@1924.49,1699.53 1934.99,1699.53 1937.23,1701.76 1937.23,1704.63 1957.59,1725 2644.67,1725 2802.49,1567.18 2810.72,1558.95 2811.05,1558.95 2814.46,1555.54 2896.98,1555.54 U2.L4@2911.02,1541.5
TXD0: U2.C7 U3.24 | length 1105.5
  Top Layer w5: U3.24@1924.49,1738.9 1934.99,1738.9 1951.09,1755 2740,1755 2761.01,1776.01 2979.83,1776.01 2980.34,1775.5 2989.95,1775.5 3005.51,1791.07 U2.C7@3005.51,1793.46
TXD1: U2.B3 U3.25 | length 1008.1
  Top Layer w5: U3.25@1898.9,1764.49 1898.9,1768.34 1901.13,1770.58 2700.58,1770.58 2728.5,1798.5 2728.5,1798.83 2738.17,1808.5 2738.5,1808.5 2740,1810 2864.57,1810 U2.B3@2879.53,1824.96
TXD2: U2.M4 U3.26 | length 1256.7
  Top Layer w5: U3.26@1879.21,1764.49 1879.21,1774.99 1881.45,1777.23 1884.32,1777.23 1894.36,1787.26 2690.41,1787.26 2694.81,1791.67 v1(2698.33,1791.67) ; v1(2896,1525) U2.M4@2911.02,1510
  Bottom Layer w5: v1(2698.33,1791.67) 2700,1790 2700,1635 2790,1545 2876,1545 v1(2896,1525)
TXD3: U2.A3 U3.27 | length 1070.6
  Top Layer w5: U3.27@1859.53,1764.49 1859.53,1774.99 1861.76,1777.23 1864.63,1777.23 1887.41,1800 2675,1800 2717.41,1842.41 2853.85,1842.41 2866.44,1855 2879.53,1855 U2.A3@2886.46,1855
TXEN: U2.B8 U3.23 | length 1158
  Top Layer w5: U3.23@1924.49,1719.21 1934.99,1719.21 1937.23,1721.45 1937.23,1724.32 1952.91,1740 v1(2750,1740) ; v1(2895.66,1809.21) 3021.26,1809.21 U2.B8@3037.01,1824.96
  Bottom Layer w5: v1(2750,1740) 2826.45,1740 v1(2895.66,1809.21)
pads on no net: J1.2 J1.3 J1.4 J1.5 J1.6 J1.7 J1.8 J1.9 J1.10 J1.11 J1.12 J1.13 J1.14 J1.15 J1.16 J1.17 J1.26 J1.27 J1.28 J1.29 J1.30 J1.31 J1.32 J1.33 J1.34 J1.35 J1.36 J1.37 J1.38 J1.39 J4.11 P2.8 SW1.2 SW1.3 U1_U_BNO0551.1 U1_U_BNO0551.7 U1_U_BNO0551.8 U1_U_BNO0551.10 U1_U_BNO0551.12 U1_U_BNO0551.13 U1_U_BNO0551.21 U1_U_BNO0551.22 U1_U_BNO0551.23 U1_U_BNO0551.24 U1_U_BNO0551.26 U1_U_BNO0551.27 U1_U_BNO0552.1 U1_U_BNO0552.7 U1_U_BNO0552.8 U1_U_BNO0552.10 U1_U_BNO0552.12 U1_U_BNO0552.13 U1_U_BNO0552.21 U1_U_BNO0552.22 U1_U_BNO0552.23 U1_U_BNO0552.24 U1_U_BNO0552.26 U1_U_BNO0552.27 U2.A1 U2.A2 U2.A4 U2.A5 U2.A6 U2.A8 U2.A9 U2.A11 U2.A12 U2.B1 U2.B2 U2.B5 U2.B6 U2.B7 U2.B9 U2.B10 U2.B12 U2.C2 U2.C3 U2.C4 U2.C5 U2.C6 U2.C8 U2.C9 U2.C11 U2.C12 U2.C13 U2.C14 U2.D1 U2.D2 U2.D3 U2.D4 U2.D5 U2.D6 U2.D7 U2.D8 U2.D9 U2.D10 U2.D11 U2.D12 U2.D13 U2.D14 U2.E1 U2.E2 U2.E3 U2.E4 U2.E12 U2.E13 U2.E14 U2.F1 U2.F3 U2.F12 U2.F13 U2.F14 U2.F15 U2.G1 U2.G2 U2.G3 U2.G4 U2.G12 U2.G13 U2.G14 U2.G15 U2.H1 U2.H2 U2.H3 U2.H4 U2.H12 U2.H13 U2.H14 U2.J2 U2.J3 U2.J4 U2.J12 U2.J13 U2.K1 U2.K2 U2.K3 U2.K4 U2.K12 U2.K13 U2.K14 U2.L1 U2.L2 U2.L3 U2.L12 U2.L13 U2.M2 U2.M5 U2.M6 U2.M7 U2.M8 U2.M9 U2.M10 U2.M11 U2.M12 U2.M13 U2.M14 U2.M15 U2.N4 U2.N6 U2.N7 U2.N8 U2.N9 U2.N10 U2.N11 U2.N12 U2.N14 U2.N15 U2.P3 U2.P4 U2.P6 U2.P7 U2.P8 U2.P9 U2.P10 U2.P11 U2.P12 U2.P14 U2.P15 U2.R4 U2.R6 U2.R7 U2.R8 U2.R9 U2.R10 U2.R11 U2.R12 U2.R13 U2.R14 U2.R15 U3.20 U3.21 U3.31 U4.10 U4.11 U4.13 U4.14 U6.5 U15.4 U15.5 U15.12 U15.13
copper on no net:
  other v1: 1610,1825

## Polygon pours and split planes (outlines as drawn)
CGND on Top Layer "NONET_L01_P002" (solid, shelved, pour order 2): 1245,390 1245,1855 520,1855 520,390
GND on Top Layer "NONET_L01_P000" (solid, shelved, pour order 0): 0,3140 4750,3140 4750,390 1295,390 1295,1905 470,1905 470,390 0,390
CGND on Bottom Layer "NONET_L04_P003" (solid, shelved, pour order 3): 1245,390 1245,1855 520,1855 520,390
GND on Bottom Layer "NONET_L04_P001" (solid, shelved, pour order 1): 0,3140 4750,3140 4750,390 1295,390 1295,1905 470,1905 470,390 0,390
3V3 on Layer 2 (split plane): 2223.77,3139.5 2224.15,3135.58 2225.3,3131.81 2227.16,3128.34 2229.65,3125.29 2232.7,3122.79 2236.17,3120.94 2239.94,3119.79 2243.86,3119.41 4730.4,3119.41 4730.4,409.6 699.56,409.6 699.74,409.71 702.73,412.27 705.29,415.26 707.34,418.62 708.85,422.25 709.77,426.08 710.08,430 710.08,1864.92 1424.92,1864.92 1424.92,435 1425.23,431.08 1426.15,427.25 1427.66,423.62 1429.71,420.26 1432.27,417.27 1435.26,414.71 1438.62,412.66 1442.25,411.15 1446.08,410.23 1450,409.92 1453.92,410.23 1457.75,411.15 1461.38,412.66 1464.74,414.71 1467.73,417.27 1470.29,420.26 1472.34,423.62 1473.85,427.25 1474.77,431.08 1475.08,435 1475.08,1890 1474.77,1893.92 1473.85,1897.75 1472.34,1901.38 1470.29,1904.74 1467.73,1907.73 1464.74,1910.29 1461.38,1912.34 1457.75,1913.85 1453.92,1914.77 1450,1915.08 1434.99,1915.08 1434.74,1915.29 1431.38,1917.34 1427.75,1918.85 1423.92,1919.77 1420,1920.08 1390,1920.08 1386.08,1919.77 1382.25,1918.85 1378.62,1917.34 1375.26,1915.29 1375.01,1915.08 685,1915.08 681.08,1914.77 677.25,1913.85 673.62,1912.34 670.26,1910.29 667.27,1907.73 664.71,1904.74 662.66,1901.38 661.15,1897.75 660.23,1893.92 659.92,1890 659.92,430 660.23,426.08 661.15,422.25 662.66,418.62 664.71,415.26 667.27,412.27 670.26,409.71 670.44,409.6 20.6,409.6 20.6,3119.41 633.87,3119.41 637.79,3119.79 641.56,3120.94 645.03,3122.79 648.08,3125.29 650.57,3128.34 652.43,3131.81 653.58,3135.58 653.96,3139.5 653.96,3619.41 1478.77,3619.41 1478.77,3139.5 1479.15,3135.58 1480.3,3131.81 1482.16,3128.34 1484.65,3125.29 1487.7,3122.79 1491.17,3120.94 1494.94,3119.79 1498.87,3119.41 1568.87,3119.41 1572.79,3119.79 1576.56,3120.94 1580.03,3122.79 1583.08,3125.29 1585.57,3128.34 1587.43,3131.81 1588.58,3135.58 1588.96,3139.5 1588.96,3619.41 2223.77,3619.41
GND on Layer 1 (split plane): 1424.92,435 1425.23,431.08 1426.15,427.25 1427.66,423.62 1429.71,420.26 1432.27,417.27 1437.27,412.27 1440.26,409.71 1440.44,409.6 704.41,409.6 704.77,411.08 705.08,415 705.08,1864.92 1424.92,1864.92
GND on Layer 1 (split plane): 2223.77,3139.5 2224.15,3135.58 2225.3,3131.81 2227.16,3128.34 2229.65,3125.29 2232.7,3122.79 2236.17,3120.94 2239.94,3119.79 2243.86,3119.41 4730.4,3119.41 4730.4,409.6 1469.56,409.6 1469.74,409.71 1472.73,412.27 1475.29,415.26 1477.34,418.62 1478.85,422.25 1479.77,426.08 1480.08,430 1479.77,433.92 1478.85,437.75 1477.34,441.38 1475.29,444.74 1475.08,444.99 1475.08,1890 1474.77,1893.92 1473.85,1897.75 1472.34,1901.38 1470.29,1904.74 1467.73,1907.73 1464.74,1910.29 1461.38,1912.34 1457.75,1913.85 1453.92,1914.77 1450,1915.08 680,1915.08 676.08,1914.77 672.25,1913.85 668.62,1912.34 665.26,1910.29 662.27,1907.73 659.71,1904.74 657.66,1901.38 656.15,1897.75 655.23,1893.92 654.92,1890 655.12,1887.5 654.92,1885 654.92,415 655.23,411.08 655.59,409.6 20.6,409.6 20.6,3119.41 633.87,3119.41 637.79,3119.79 641.56,3120.94 645.03,3122.79 648.08,3125.29 650.57,3128.34 652.43,3131.81 653.58,3135.58 653.96,3139.5 653.96,3619.41 1478.77,3619.41 1478.77,3139.5 1479.15,3135.58 1480.3,3131.81 1482.16,3128.34 1484.65,3125.29 1487.7,3122.79 1491.17,3120.94 1494.94,3119.79 1498.87,3119.41 1568.87,3119.41 1572.79,3119.79 1576.56,3120.94 1580.03,3122.79 1583.08,3125.29 1585.57,3128.34 1587.43,3131.81 1588.58,3135.58 1588.96,3139.5 1588.96,3619.41 2223.77,3619.41

## Keep-outs
Keep-Out Layer:
  rectangle: 0,390 350,3140
  rectangle: 4400,390 4750,3140

## Other copper
Layer 1 (plane layer: these items are gaps in the copper):
  lines w50: 680,415 680,1885 ; 680,1890 1450,1890 1450,435 1455,430
Layer 2 (plane layer: these items are gaps in the copper):
  lines w50: 685,430 685,1890 1450,1890 1450,435 ; 1390,1895 1420,1895

## Silkscreen, mask and mechanical layers (free items; w line width, h text height)
Top Overlay:
  text "UARTRX" at 2970,2875 h60
  text "UARTTX" at 2975,2800 h60
  text "CANL" at 2975,2725 h60
  text "CANH" at 2975,2645 h60
Top Solder:
  region: 3955,1985 3955,1825 4175,1825 4175,1985
  region: 4020,1455 4020,1295 4230,1295 4230,1455

## Text inside footprints (layer, text, board x,y; h text height)
P1: Top Overlay "7" at 1770,3025 h50 r90; Top Overlay "8" at 1670,3025 h50 r90
SW1: Mechanical 7 "0.177in/4.496mm" at 3223.85,2357.5 h25; Mechanical 7 "0.126in/3.2mm" at 2973.85,2357.5 h25; Mechanical 7 "0.177in/4.496mm" at 2666.25,2588.5 h25; Mechanical 7 "0.207in/5.25mm" at 2672.5,2136.5 h25; Mechanical 7 "Alt 2 Padstyle: RX90Y0D30P" at 2435,1731.5 h50; Mechanical 7 "Alt 1 Padstyle: RX60Y90D30P" at 2422.5,1791.5 h50; Mechanical 7 "Default Padstyle: RX61Y39D0T" at 2410,1911.5 h50